# Altium PCB PCB1.PcbDoc
Units mm, origin at the board's own origin, x right, y up, seen from the top; angles counter-clockwise.
Board outline 22 x 22 mm, 4 copper layers (Top Layer, Internal Plane 1, Signal Layer 1, Bottom Layer), stack 0.778 mm thick; 56 components, 36 nets, 187 pads, 214 vias.
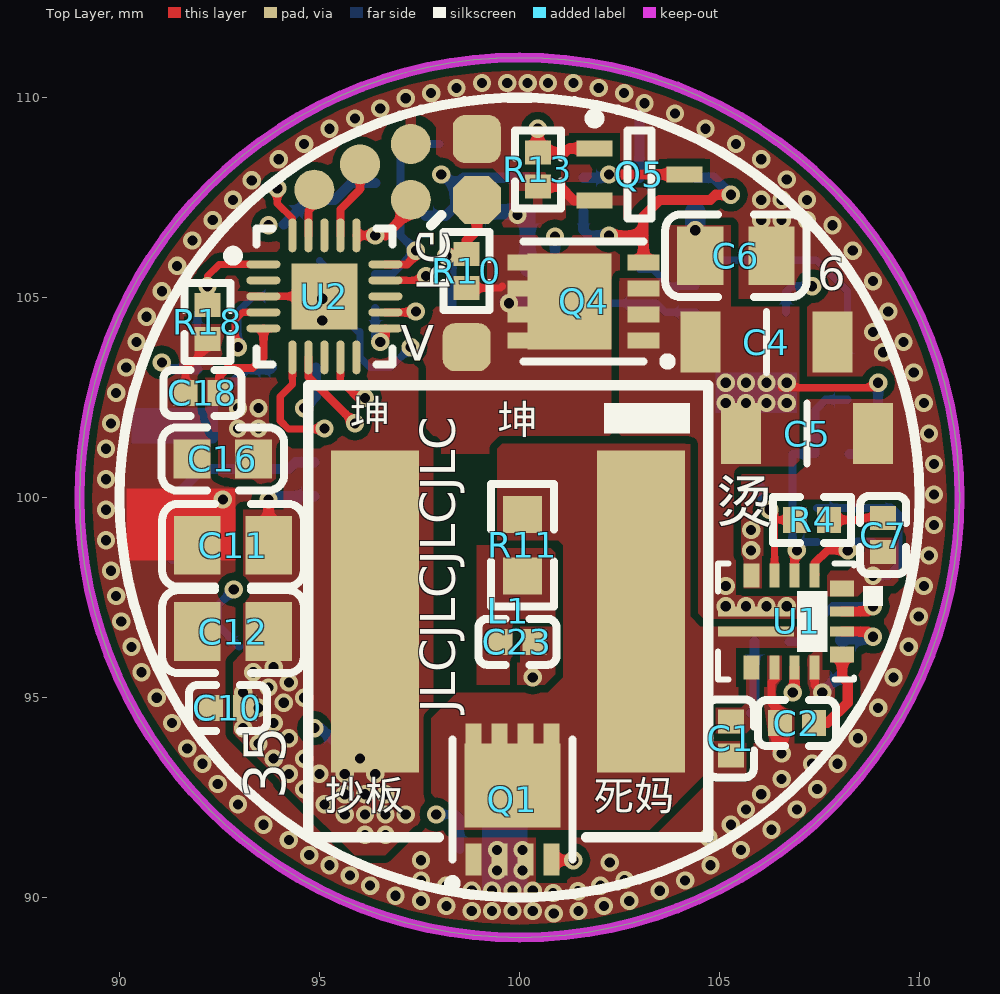
[diagram p0: Top Layer view]
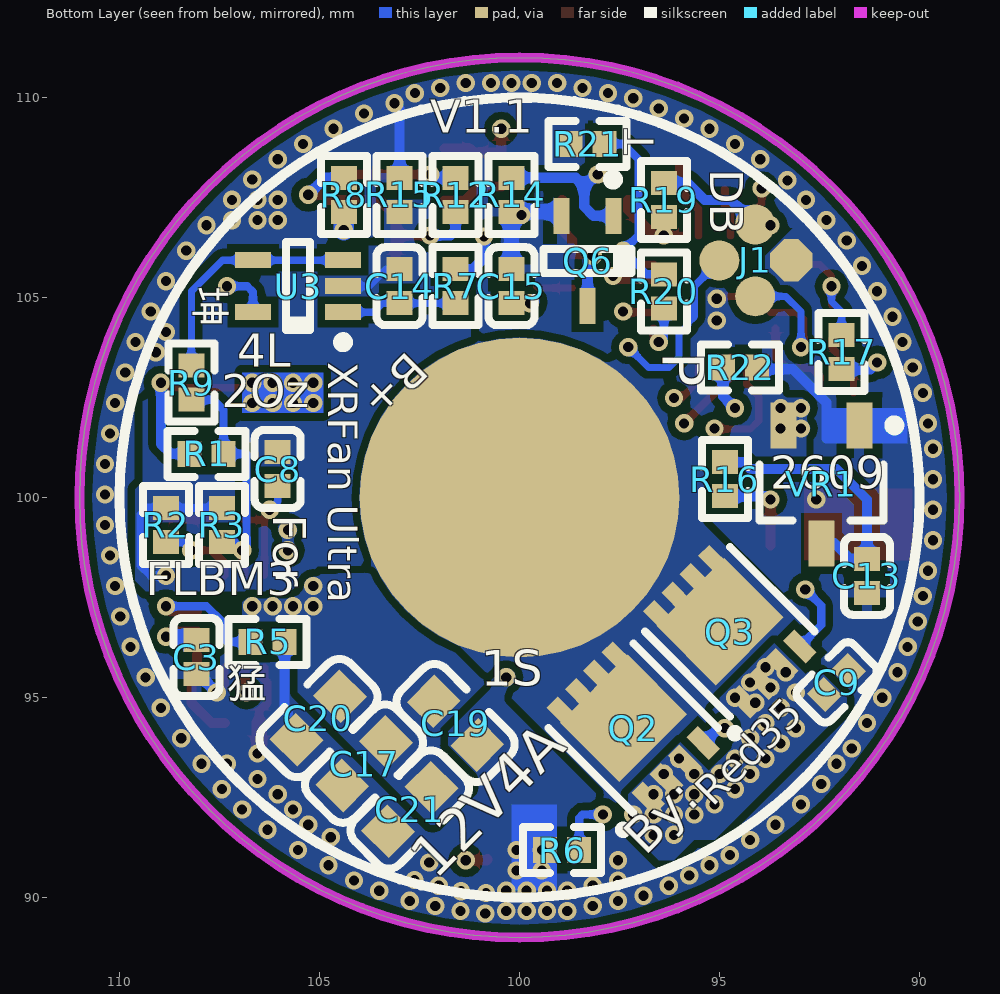
[diagram p1: Bottom Layer view, seen from below]
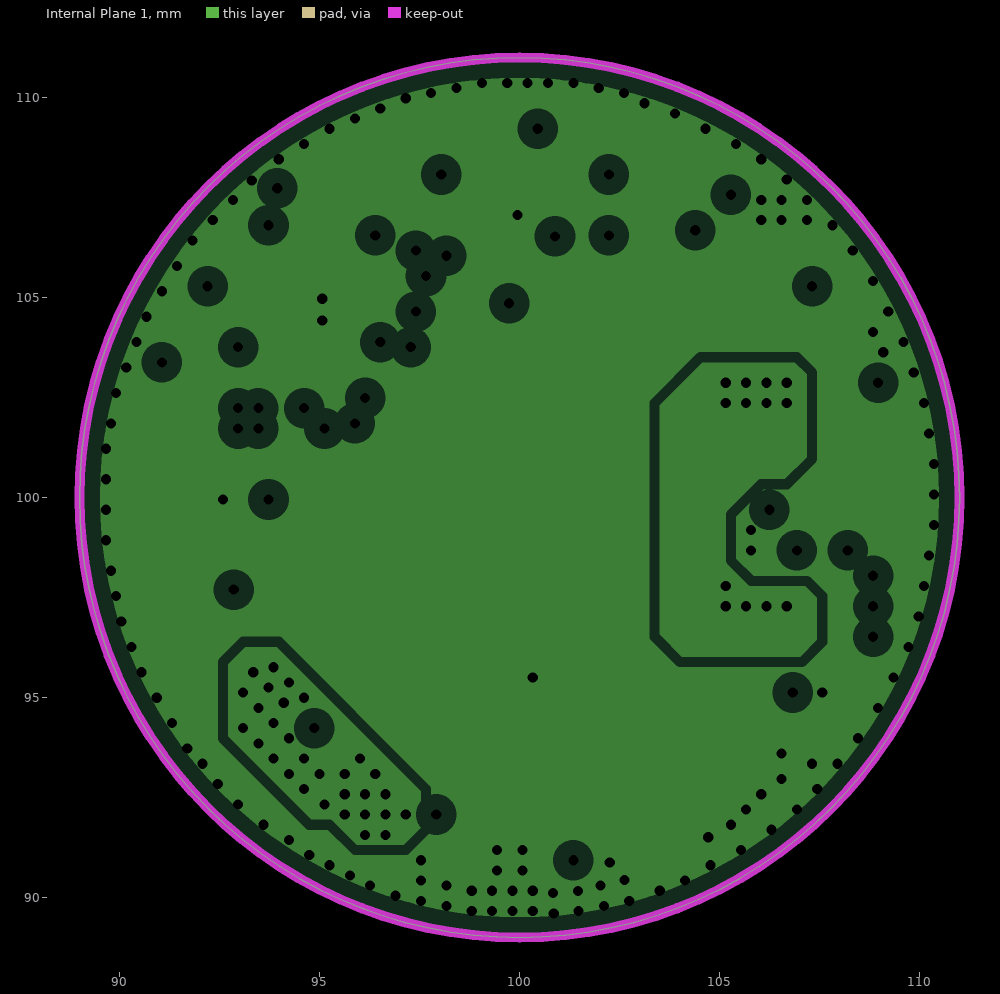
[diagram p2: Internal Plane 1, clearances drawn from the general rule]
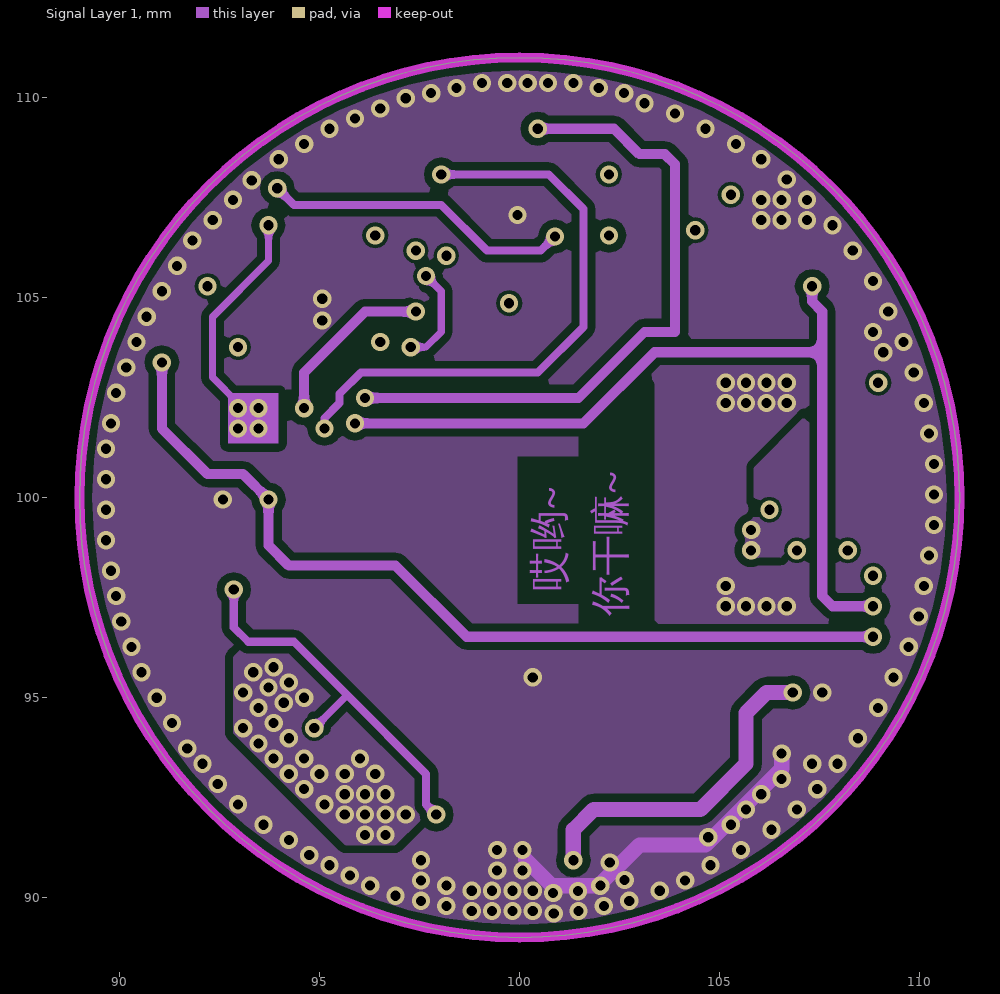
[diagram p3: Signal Layer 1]
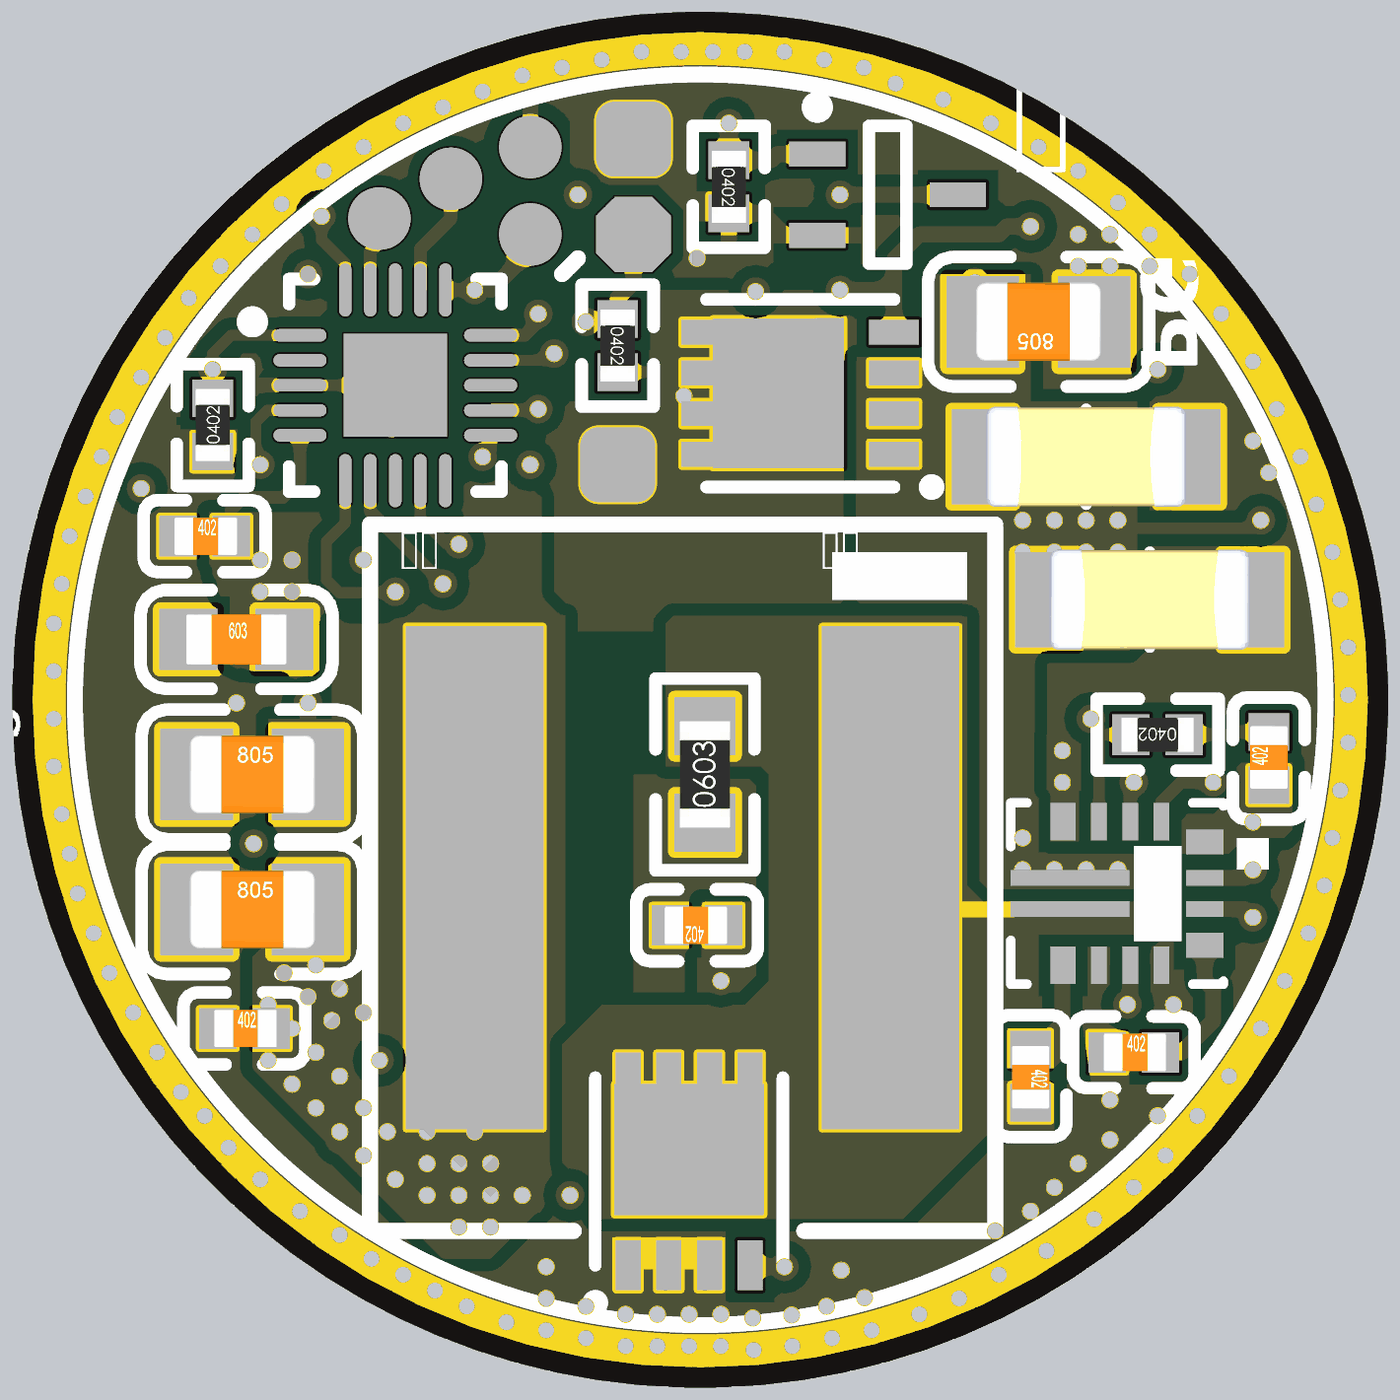
[diagram p4: 3D render of the assembled board from above, using the file's embedded part models]
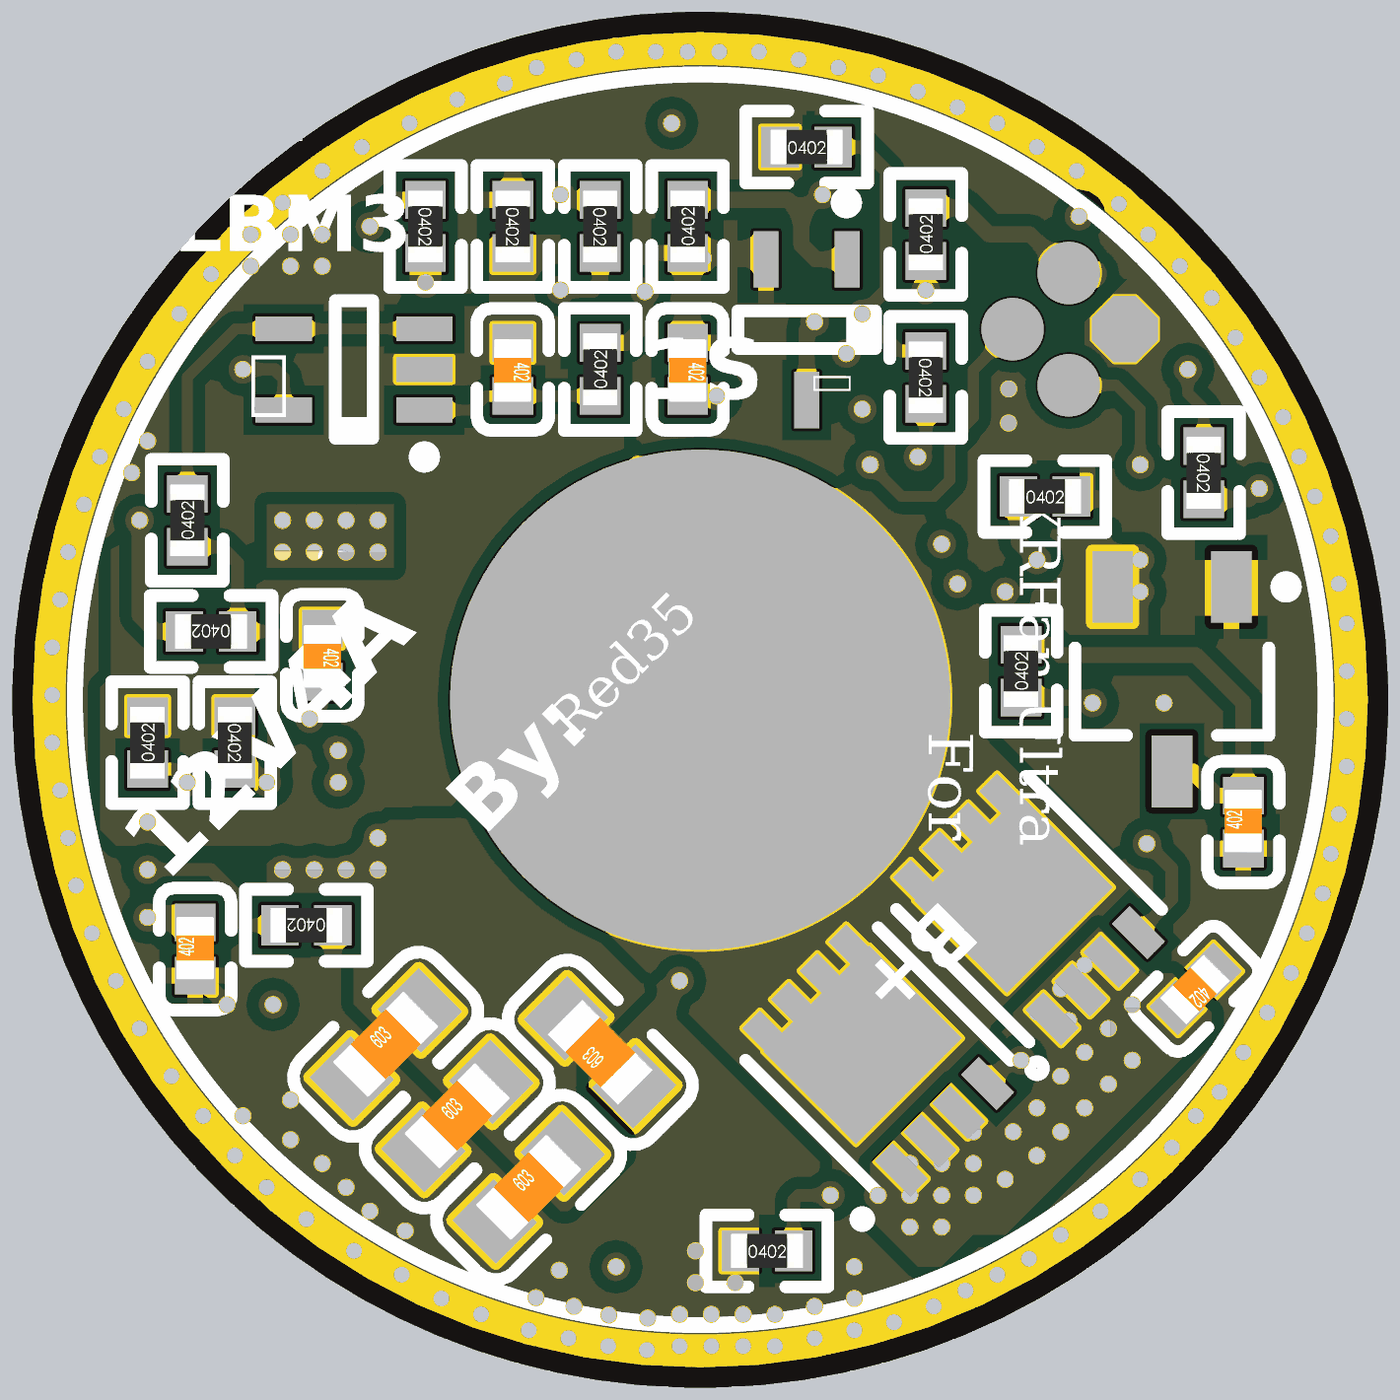
[diagram p5: 3D render of the assembled board from below, using the file's embedded part models]

## Layer stack, top to bottom
Top Solder: solder mask 0.0102, Solder Resist, Dk 3.5
Top Layer: signal copper 0.0356
Dielectric 1: core 0.254, FR-4, Dk 4.2
Internal Plane 1: plane copper 0.036
Dielectric 3: prepreg 0.127, Dk 4.2
Signal Layer 1: signal copper 0.036
Dielectric 2: core 0.254, Dk 4.2
Bottom Layer: signal copper 0.0356
Bottom Solder: solder mask 0.0102, Solder Resist, Dk 3.5

## Board outline
100,89 cw(c100,100) 89,100 cw(c100,100) 100,111 cw(c100,100) 111,100 cw(c100,100)

## Design rules (kind name [scope] priority, off if disabled: settings)
Clearance [All] p1: gap=0.193
PlaneClearance [All] p1: clearance=0.381
PlaneConnect [All] p1: planeconnectstyle=Direct reliefexpansion=0.508 reliefentries=4 reliefconductorwidth=0.254 reliefairgap=0.254
PolygonConnect PolygonConnect_1 [IsVia] p1: connectstyle=Direct reliefconductorwidth=0.254 reliefentries=4 polygonreliefangle="90 Angle" airgapwidth=0.254
PolygonConnect [All] p2: connectstyle=Direct reliefconductorwidth=0.254 reliefentries=4 polygonreliefangle="90 Angle" airgapwidth=0.254
RoomDefinition main [InComponentClass('main')] p1: confinementstyle=ConfineIn formatcopy=TRUE lockcomponents=FALSE outline 112.649,87.503 163.322,87.503 163.322,98.171 112.649,98.171
RoutingVias [All] p1: holewidth=0.711 width=1.27 viastyle="Through Hole" minholewidth=0.711 minwidth=1.27 maxholewidth=0.711 maxwidth=1.27
SolderMaskExpansion [All] p1: expansion=0.102
Width [All] p1: maxlimit=5.08 minlimit=0.178 preferedwidth=0.254
28 further rules are at their usual default settings.

## Components (designator, comment, footprint, x,y, rotation, side; value= is the part's Value field where it differs from the comment)
C1 "100nF (104) 10% 50V" 0402_C 105.283,93.98 r270 top
C2 "4.7uF (475) 20% 10V" 0402_C 106.934,94.361 r0 top
C3 "100nF (104) 10% 50V" 0402_C 108.077,96.012 r90 bottom
C4 "GRM31CR61E476ME44L" 1206C 106.172,103.886 r180 top
C5 "GRM31CR61E476ME44L" 1206C 107.188,101.6 r180 top
C6 "22uF (226) 20% 25V" 0805_C 105.41,106.045 r180 top
C7 "47nF (473) 10% 50V" 0402_C 109.093,99.06 r90 top
C8 "56pF (560) 5% 50V" 0402_C 106.045,100.711 r270 bottom
C9 "10uF (106) 20% 10V" 0402_C 92.075,95.377 r315 bottom
C10 "10uF (106) 20% 10V" 0402_C 92.71,94.742 r0 top
C11 "C2012X5R1A476MTJ00E" 0805_C 92.837,98.806 r0 top
C12 "C2012X5R1A476MTJ00E" 0805_C 92.837,96.647 r0 top
C13 "10uF (106) 20% 10V" 0402_C 91.313,98.044 r90 bottom
C14 "1.0uF (105) 10% 25V" 0402_C 102.997,105.283 r270 bottom
C15 "1.0uF (105) 10% 25V" 0402_C 100.203,105.283 r270 bottom
C16 "GRM188R61E106KA73D" 0603_C 92.583,100.965 r0 top
C17 "GRM188R61E106KA73D" 0603_C 103.886,93.345 r135 bottom
C18 "100nF (104) 10% 50V" 0402_C 92.075,102.616 r0 top
C19 "GRM188R61E106KA73D" 0603_C 101.6,94.361 r45 bottom
C20 "GRM188R61E106KA73D" 0603_C 105.029,94.488 r135 bottom
C21 "GRM188R61E106KA73D" 0603_C 102.743,92.202 r135 bottom
C23 "2.2nF (222) 10% 50V" 0402_C 99.949,96.393 r180 top
J1 "CMS8S-JTAG-TP-1.27mm" CMS8S-JTAG-TP-2x2-P1.27 94.107,105.029 r45 top
L1 "XAL1060-222MEC" XAL1060-472ME-Lifted 96.393,97.155 r0 top locked
Q1 "BSZ024N04LS6ATMA1" DFN-8_L3.0-W3.0-P0.65-BL 99.822,92.456 r0 top
Q2 "XPX80P02RX" DFN-8_L3.0-W3.0-P0.65-BL 97.155,94.234 r135 bottom locked
Q3 "XPX80P02RX" DFN-8_L3.0-W3.0-P0.65-BL 94.742,96.647 r135 bottom locked
Q4 "XPX70P03RX" DFN-8_L3.0-W3.0-P0.65-BL 101.6,104.902 r90 top
Q5 "2N7002KW" SC70-3 102.997,108.077 r0 top
Q6 "2N7002KW" SC70-3 98.298,105.918 r270 bottom locked
R1 "510KΩ (5103) ±1%" 0402_R 107.823,101.092 r0 bottom
R2 "RT0402BRD0720KL" 0402_R 108.839,99.314 r90 bottom
R3 "59KΩ (5902) ±1%" 0402_R 107.442,99.314 r270 bottom
R4 "PTFR0402B10K0N9" 0402_R 107.315,99.441 r180 top
R5 "10KΩ (1002) ±1%" 0402_R 106.299,96.393 r0 bottom
R6 "10KΩ (1002) ±1%" 0402_R 98.933,91.186 r180 bottom
R7 "10KΩ (1002) ±1%" 0402_R 101.6,105.283 r90 bottom
R8 "51KΩ (5102) ±1%" 0402_R 104.394,107.569 r270 bottom
R9 "220KΩ (2203) ±1%" 0402_R 108.204,102.87 r90 bottom
R10 "22KΩ (2202) ±1%" 0402_R 98.679,105.664 r270 top
R11 "2.2Ω (2R20) ±1%" 0603_R 100.076,98.806 r90 top
R12 "47KΩ (4702) ±1%" 0402_R 101.6,107.569 r270 bottom
R13 "10KΩ (1002) ±1%" 0402_R 100.457,108.204 r270 top
R14 "10KΩ (1002) ±1%" 0402_R 100.203,107.569 r90 bottom
R15 "0Ω (0R0) ±1%" 0402_R 102.997,107.569 r270 bottom
R16 "10Ω (10R0) ±1%" 0402_R 94.869,100.457 r90 bottom
R17 "AR02BTD4703" 0402_R 91.948,103.632 r270 bottom
R18 "ERA2AEB104X" 0402_R 92.202,104.394 r90 top
R19 "10KΩ (1002) ±1%" 0402_R 96.393,107.442 r90 bottom
R20 "RC0402DR-07330KL" 0402_R 96.393,105.156 r270 bottom
R21 "FNTC0402X104D4250DB" 0402_R 98.298,108.839 r180 bottom
R22 "TBD" 0402_R 94.488,103.251 r180 bottom
U1 "TPS61287RZPR" RZP0014A-TPS61287 106.934,96.901 r270 top locked
U2 "CMS8S6990NAQN20" QFN40P300X300X800_HS-21N 95.123,105.029 r0 top
U3 "LMV321IDCKR" SC70-5 105.537,105.283 r0 bottom
VR1 "ME6209A30M3G" SOT-23-3L 92.456,100.33 r90 bottom

## Footprints (in the part's own frame and the unit in brackets; to place one, negate y for a bottom-side part, rotate by r counter-clockwise, add the part's x,y. Pads: shape width x height; smd on the part's side, far side on the other; paste and mask are expansions set on the pad)
0402_C [mm]
  rect 0.6x0.65 smd mask+0.051: 1(-0.425,0) 2(0.425,0)
  silkscreen extent -0.97,-0.58 0.97,0.58, body extent -0.48,-0.3 0.52,0.3, height 0.2
0402_R [mm]
  rect 0.6x0.65 smd mask+0.051: 1(-0.425,0) 2(0.425,0)
  silkscreen extent -0.97,-0.58 0.97,0.58, body extent -0.57,-0.27 0.57,0.28, height 0.41
0603_C [mm]
  rect 0.93x0.98 smd: 1(-0.77,0) 2(0.77,0)
  silkscreen extent -1.53,-0.79 1.54,0.79, body extent -0.8,-0.4 0.8,0.4, height 0.3
0603_R [mm]
  rect 0.93x0.98 smd: 1(-0.77,0) 2(0.77,0)
  silkscreen extent -1.53,-0.79 1.54,0.79, body extent -0.85,-0.4 0.85,0.4, height 0.56
0805_C [mm]
  rect 1.16x1.47 smd: 1(-0.89,0) 2(0.89,0)
  silkscreen extent -1.77,-1.04 1.77,1.04, body extent -1,-0.62 1,0.63, height 0.77
1206C [mil]
  rect 39.37x60 smd: 1(-65,0) 2(65,0)
  silkscreen extent 0,-30 0,30, body extent -63,-31 63,31, height 37
CMS8S-JTAG-TP-2x2-P1.27 [mm] "面向CMS8S单片机使用的2*2排列，间距1.27mm的调试接口"
  oct 1x1 smd far side mask+0.03: 1(0,1.27)
  round 1 smd far side mask+0.03: 2(1.27,1.27) 3(0,0) 4(1.27,0)
DFN-8_L3.0-W3.0-P0.65-BL [mm]
  rect 0.4x0.8 smd paste-100 mask+0.051: 1(-0.975,-1.5) 2(-0.325,-1.5) 3(0.325,-1.5) 4(0.975,-1.5) 5(0.975,1.5) 6(0.325,1.5) 7(-0.325,1.5) 8(-0.975,1.5)
  rect 2.4x2.1 smd paste-100 mask+0.051: 8(0,0.35)
  silkscreen extent -1.6,-2.2 1.5,1.5, body extent -1.52,-1.52 1.52,1.52, height 1.2
QFN40P300X300X800_HS-21N [mm] "QFN, 20-Leads, Body 3.00x3.00mm, Pitch 0.40mm, Thermal Pad 1.65x1.65mm, IPC Medium Density"
  oval 0.85x0.2 smd mask+0.03: 1(-1.525,0.8) 2(-1.525,0.4) 3(-1.525,0) 4(-1.525,-0.4) 5(-1.525,-0.8) 11(1.525,-0.8) 12(1.525,-0.4) 13(1.525,0) 14(1.525,0.4) 15(1.525,0.8)
  oval 0.2x0.85 smd mask+0.03: 6(-0.8,-1.525) 7(-0.4,-1.525) 8(0,-1.525) 9(0.4,-1.525) 10(0.8,-1.525) 16(0.8,1.525) 17(0.4,1.525) 18(0,1.525) 19(-0.4,1.525) 20(-0.8,1.525)
  rect 1.65x1.65 smd mask+0.03: 21(0,0)
  silkscreen extent -2.41,-1.7 1.7,1.7, body extent -1.55,-1.55 1.55,1.55, height 0.8
RZP0014A-TPS61287 [mm]
  rect 0.6x0.25 smd paste+0 mask+0: 1(-1.15,0.443) 2(-1.15,-0.057) 3(-1.15,-0.557) 8(1.15,-0.557) 9(1.15,-0.057) 10(1.15,0.443)
  rect 0.6x0.4 smd paste+0 mask+0: 4(-1.15,-1.132) 7(1.15,-1.132)
  rect 0.25x1.9 smd paste+0 mask+0: 5(-0.25,-1.017) 6(0.25,-1.017)
  rect 0.4x0.6 smd paste+0 mask+0: 11(0.825,1.133) 14(-0.825,1.133)
  rect 0.25x0.6 smd paste+0 mask+0: 12(0.25,1.133) 13(-0.25,1.133)
  silkscreen extent -1.45,-1.97 1.45,1.43, body extent -1.4,-1.92 1.4,1.38, height 1
SC70-3 [mm] "3 Lead SC70(SOT-323) package for small Transistor"
  rect 0.9x0.4 smd mask+0.05: 1(-1.125,0.65) 2(-1.125,-0.65) 3(1.125,0)
  silkscreen extent -1.25,-1.1 0.3,1.52, body extent -0.67,-1.1 0.67,1.1, height 1.1
SC70-5 [mm] "SOT23, 6-Leads, Body 2.00x2.10mm, Pitch 0.65mm, IPC Medium Density"
  rect 0.9x0.4 smd mask+0.05: 1(-1.125,0.65) 2(-1.125,0) 3(-1.125,-0.65) 4(1.125,-0.65) 5(1.125,0.65)
  silkscreen extent -1.25,-1.1 0.3,1.52, body extent -0.67,-1.1 0.67,1.1, height 1.1
SOT-23-3L [mm] "http://www.aosmd.com/res/packaging_information/SOT-23-3L.pdf"
  rect 1.15x0.65 smd: 1(1.475,-0.95) 2(1.475,0.95) 3(-1.475,0)
  silkscreen extent -0.9,-1.95 1.6,1.55, body extent -0.9,-1.55 0.9,1.55, height 1.25
XAL1060-472ME-Lifted [mm] "线艺XAL1060电感的特殊封装，使用铜条向上抬升电感高度在电感下部塞元器件"
  rect 2.2x8.05 smd mask+0.05: 1(0,0) 2(6.65,0)
  silkscreen extent -1.68,-5.65 8.32,5.65, body extent -1.65,-5.71 8.38,5.71, height 7

## Part data
C1 C3 C7 C18: library part "0402 100nF (104) 10% 16V", "贴片电容"
C2: library part "0402 4.7uF (475) 20% 10V", "贴片电容"
C4 C5: library part Cap, "1206尺寸村田MLCC 25V 47uF X5R ±20%"
C6: library part "0805 22uF (226) 20% 25V", "贴片电容"
C8: library part "0402 56pF (560) 5% 50V", "贴片电容"
C9 C10 C13: library part "0402 10uF (106) 20% 6.3V", "贴片电容"
C11 C12: library part "0805 22uF (226) 20% 25V", "贴片MLCC电容，X5R 47uF ±20% 10V"
C14 C15: library part "0402 1.0uF (105) 10% 25V", "贴片电容"
C16 C17 C19 C20 C21: library part "0603 10uF (106) 10% 10V", "村田贴片MLCC电容 25V 10uF±20% X5R 0603封装"
C23: library part "0402 2.2nF (222) 10% 50V", "贴片电容"
J1: "面向CMS8S6990NA单片机的调试贴片触点，并不是元器件实物"
L1: library part "Inductor Iron", "线艺一体成型模压电感，9.8mΩ DCR 25A饱和电流 4.7uH±20%电感量 10*11*6mm尺寸"
Q1: library part "SON/DFN5x6 MOS", "英飞凌OptiMOS 6 40V N沟道功率MOS 2.8mΩ@4.5V S3O8封装"
Q2 Q3: library part "SON/DFN5x6 MOS", "PDFN3x3 30V 50A N沟道MOSFET"
Q4: library part "SON/DFN5x6 MOS", "-30V -70A 6.5mR P沟道增强型MOSFET"
Q5 Q6: library part "2N7002 7002", "单N沟道MOSFET(场效应管)"
R1 R3: library part "0402 510KΩ (5103) 1%", "贴片电阻"
R2: library part "0402 20KΩ (2002) 1%", "0402贴片薄膜高精密电阻 20KΩ ±0.1% 62.5mW 25PPM"
R4: library part "0402 12KΩ (1202) 1%", "0402贴片薄膜高精密电阻 10KΩ ±0.1% 62.5mW 25PPM"
R5 R6 R7 R13 R14 R19: library part "0402 10KΩ (1002) 1%", "贴片电阻"
R8: library part "0402 47KΩ (4702) 1%", "贴片电阻"
R9: library part "0402 100KΩ (1003) 1%", "贴片电阻"
R10: library part "0402 22KΩ (2202) 1%", "贴片电阻"
R11: library part "0603 2.2Ω (2R20) 1%", "贴片电阻"
R12: library part "0402 51KΩ (5102) 1%", "贴片电阻"
R15 R22: library part "0402 0Ω (0R0) 1%", "贴片电阻"
R16: library part "0402 10Ω (10R0) 1%", "贴片电阻"
R17: library part "0402 470KΩ (4703) 1%", "0402 贴片薄膜高精密低温飘电阻 470KΩ±0.1% 25PPM"
R18: library part "0402 100KΩ (1003) 1%", "松下 0402精密低温飘贴片电阻 100KΩ±0.1% 62.5mW"
R20: library part "0402 470KΩ (4703) 1%", "0402厚膜较高精度贴片电阻 330KΩ±0.5% 62.5mW"
R21: library part "0402 200KΩ (2003) 1%", "0402尺寸贴片式NTC热敏电阻 B25-85℃=4310±0.5% R25=100KΩ±0.5%"
U1: library part TPS61287, "Synchronous Boost Converter with Stackable Multi-Phase Function"
U2: library part CM8S6990NA-QFN20, "增强型闪存1T 8051单片机，16KB Flash 256+1K XRAM"
U3: "CMOS超小型运算放大器，SC70-5"
VR1: library part "SOT-23 XC6206P332MR", "低压差线性稳压(LDO)"

## Free pads (board coordinates)
  rrect50% 1.2x1.2 smd mask+0.03: 1(98.679,103.759) 1(98.933,108.966)
  oct 1.2x1.2 smd mask+0.03: 1(98.933,107.442)
  round 8 smd far side mask+0.03: 1(100,100)
  round 1 smd mask+0.03: 4(94.869,107.696) 4(96.012,108.331) 4(97.282,107.442) 4(97.282,108.839)

## Via types
v1: diameter 0.457, hole 0.254, Top Layer to Bottom Layer, tented both sides, 214 vias

## Nets (pads, with @x,y where several pads share a name; then routed paths per layer and width w, separated by ;. In a path a pad name is that pad's centre, name@x,y a point inside that pad or via, vN(x,y) a via of type N, cw(c..) or ccw(c..) an arc to the next point about the centre after c; other vN are vias at no path point)
3V7: C3.2 C9.2 C10.2 C11.2 C12.2 L1.1 Q2.1 Q2.2 Q2.3 Q3.1 Q3.2 Q3.3 R16.1 R17.2 U1.12 | length 27.2
  Top Layer w0.254: v1(93.726,99.949) v1(93.726,99.949) C11.2 ; U1.12 108.708,96.651 v1(108.839,96.52)
  Signal Layer 1 w0.254: v1(91.059,103.378) 91.059,101.727 92.202,100.584 93.091,100.584 v1(93.726,99.949) 93.726,98.806 94.234,98.298 96.901,98.298 98.679,96.52 v1(108.839,96.52)
  Bottom Layer w0.254: v1(91.059,103.378) 91.23,103.207 R17.2 ; v1(93.726,99.949) 93.809,100.032 R16.1
  Bottom Layer w0.381: C3.2 108.16,96.52 v1(108.839,96.52)
  other v1: 96.139,91.567 96.647,91.567 95.631,92.075 96.139,92.075 96.647,92.075 97.155,92.075 95.123,92.329 95.631,92.583 96.139,92.583 96.647,92.583 94.615,92.71 94.234,93.091 94.996,93.091 95.631,93.091 96.393,93.091 93.853,93.472 94.615,93.472 96.012,93.472 93.472,93.853 94.234,93.98 93.091,94.234 93.853,94.361 93.472,94.742 94.107,94.869 94.615,94.996 93.091,95.123 93.726,95.25 94.234,95.377 93.345,95.631 93.853,95.758
12V: C4.2 C5.2 C6.2 C17.2 C19.2 C20.2 C21.2 Q4.1 Q4.2 Q4.3 R1.2 R8.2 U1.5 | length 5.3
  Top Layer w0.178: v1@106.553,102.743 108.839,102.743 v1(108.966,102.87)
  Bottom Layer w0.254: R1.2 108.712,101.092 108.966,101.346 v1(108.966,102.87)
  Bottom Layer w0.508: v1(104.394,106.68) R8.2
  other v1: 105.156,97.282 105.664,97.282 106.172,97.282 106.68,97.282 105.156,97.79 105.156,102.362 105.664,102.362 106.172,102.362 106.68,102.362 105.156,102.87 105.664,102.87 106.172,102.87 106.68,102.87
BST: C1.1 U1.7
COMP: C8.2 R4.2 U1.3 | length 2.9
  Top Layer w0.178: v1(106.247,99.695) 106.377,99.566 106.377,99.392 ; U1.3 106.377,99.392 ; R4.2 106.426,99.441 106.377,99.392
  Bottom Layer w0.178: C8.2 106.045,99.897 v1(106.247,99.695)
DCEN: R5.2 U1.13 U2.7 U3.5 | length 28.5
  Top Layer w0.203: U2.7 94.723,103.016 95.863,101.876 95.863,101.854 v1(95.885,101.854)
  Top Layer w0.254: U1.13 108.708,97.151 v1(108.839,97.282)
  Signal Layer 1 w0.254: v1(95.885,101.854) 101.6,101.854 103.378,103.632 107.569,103.632 ; v1(107.315,105.283) 107.315,104.902 107.569,104.648 107.569,103.632 ; v1(108.839,97.282) 107.823,97.282 107.569,97.536 107.569,103.632
  Bottom Layer w0.203: U3.5 106.662,105.138 106.807,105.283 v1(107.315,105.283) ; R5.2 107.315,96.393 107.442,96.52 107.442,96.901 107.823,97.282 v1(108.839,97.282)
DSCK: J1.4 U2.14 | length 8
  Top Layer w0.178: U2.14 97.555,105.429 v1(97.663,105.537)
  Signal Layer 1 w0.178: v1(97.282,103.759) 97.663,103.759 98.044,104.14 98.044,105.156 v1(97.663,105.537)
  Bottom Layer w0.178: J1.4 95.005,105.909 95.631,105.283 95.631,104.521 95.786,104.366 95.786,104.314 95.951,104.149 96.008,104.149 96.008,104.115 96.009,104.114 96.009,103.854 96.009,103.675 96.012,103.672 96.012,103.505 96.266,103.251 96.774,103.251 v1(97.282,103.759)
DSDA: J1.3 U2.4 | length 3.8
  Top Layer w0.178: v1(92.964,103.759) 92.891,103.832 92.891,104.448 93.072,104.629 U2.4 U2.4@93.725,104.629
  Bottom Layer w0.178: v1(92.964,103.759) 92.964,104.648 93.345,105.029 J1.3
FANG: Q4.4 R8.1 R12.2 | length 6.6
  Top Layer w0.254: v1(102.235,106.553) 103.1,106.553 ; Q4.4 103.1,106.553 ; v1(105.283,107.569) 104.902,107.569 104.775,107.442 103.505,107.442 103.1,107.037 103.1,106.553
  Bottom Layer w0.254: R12.2 101.6,106.68 101.727,106.553 v1(102.235,106.553) ; R8.1 104.858,107.994 v1(105.283,107.569)
FANPWM: pad.1@98.933,107.442 Q6.3 R10.1 | length 3.3
  Top Layer w0.254: v1(98.171,106.045) 98.215,106.089 R10.1 98.679,106.426 98.933,106.68 pad.1@98.933,107.442
  Bottom Layer w0.254: v1(98.171,106.045) 98.298,105.918 Q6.3
FANPWREN: Q5.1 R13.1 U2.9 | length 19.8
  Top Layer w0.178: U2.9 95.523,102.912 95.946,102.489 v1(96.139,102.489)
  Top Layer w0.254: v1(100.457,109.22) R13.1 101.136,108.629 101.234,108.727 Q5.1
  Signal Layer 1 w0.254: v1(96.139,102.489) 101.473,102.489 103.124,104.14 103.886,104.14 103.886,108.331 103.632,108.585 102.997,108.585 102.362,109.22 v1(100.457,109.22)
FB: R1.1 R3.2 R9.1 U1.2 | length 6.3
  Top Layer w0.203: U1.2 106.877,98.495 v1@107.061,98.679
  Bottom Layer w0.203: R3.2 107.144,98.889 v1(106.934,98.679) 106.822,98.791 106.822,101.092 R1.1 107.398,102.191 107.652,102.445 R9.1
FWMODE: R22.1 U2.12 | length 6.2
  Top Layer w0.203: U2.12 v1@97.39,104.629
  Top Layer w0.254: v1@97.39,104.629 v1(97.409,104.648)
  Signal Layer 1 w0.254: v1(94.615,102.235) 94.615,103.124 96.139,104.648 v1(97.409,104.648)
  Bottom Layer w0.254: v1(94.615,102.235) 94.913,102.533 R22.1
GLED: pad.4@96.012,108.331 U2.17 | length 2
  Top Layer w0.203: U2.17 95.523,107.207 96.012,107.696 pad.4@96.012,108.331
GND: C2.1 C3.1 C4.1 C5.1 C6.1 C9.1 C10.1 C11.1 C12.1 C13.1 C15.1 C16.1 C17.1 C18.1 C19.1 C20.1 C21.1 C23.1 J1.1 pad.1@98.933,108.966 pad.4@97.282,108.839 Q1.1 Q1.2 Q1.3 Q5.2 Q6.2 R5.1 R6.1 R13.2 R14.1 R15.1 R18.1 R21.1 R22.2 U1.4 U1.8 U1.10 U2.3 U2.21 VR1.1 | length 25.7
  Top Layer w0.178: C18.1 91.65,103.207 92.202,103.759 R18.1 ; U2.3@93.725,105.029 U2.21@95.25,105.029
  Top Layer w0.203: U1.8 106.377,95.455 106.299,95.377 106.299,94.869 106.509,94.659 C2.1 ; U1.10 107.377,95.315 v1@107.442,95.25
  Top Layer w0.254: R13.2 101.009,107.779 101.361,107.427 Q5.2
  Top Layer w0.381: C2.1 106.509,93.643 v1(106.553,93.599)
  Signal Layer 1 w0.381: 100.147,90.956 100.806,90.297 101.981,90.297 102.997,91.313 104.648,91.313 106.553,93.218 v1(106.553,93.599)
  Bottom Layer w0.254: 92.329,101.473 92.329,102.376 93.163,103.21 93.768,103.21 R22.2@93.809,103.251 ; R15.1 102.997,109.728 v1(103.124,109.855) ; 105.791,94.615 105.874,94.698 R5.1 ; v1(107.569,95.123) 108.033,95.587 C3.1
  Bottom Layer w0.381: Q6.2 99.049,107.144 R14.1 C15.1
  other v1: 100.855,89.6 98.806,89.662 99.314,89.662 99.822,89.662 100.33,89.662 101.473,89.662 98.171,89.789 102.108,89.789 97.536,89.916 102.743,89.916 96.901,90.043 100.84,90.111 98.806,90.17 99.314,90.17 99.822,90.17 100.33,90.17 101.462,90.159 103.505,90.17 96.266,90.297 98.171,90.297 102.021,90.298 97.536,90.424 102.628,90.436 104.14,90.424 95.758,90.551 99.441,90.678 100.076,90.678 95.25,90.805 104.775,90.805 102.255,90.876 97.536,90.932 94.742,91.059 99.441,91.186 100.076,91.186 105.537,91.186 94.234,91.44 104.718,91.505 106.299,91.694 93.599,91.821 105.283,91.821 105.664,92.202 106.934,92.202 92.964,92.329 106.045,92.583 107.442,92.71 92.456,92.837 106.553,92.964 92.075,93.345 107.315,93.345 107.95,93.345 91.694,93.726 108.458,93.98 91.313,94.361 108.966,94.742 90.932,94.996 100.33,95.504 109.347,95.504 90.551,95.631 90.297,96.266 109.728,96.266 90.043,96.901 109.982,97.028 89.916,97.536 110.109,97.79 89.789,98.171 110.236,98.552 105.791,98.679 89.662,98.933 105.791,99.187 110.363,99.314 89.662,99.695 92.583,99.949 110.363,100.076 89.662,100.457 110.363,100.838 89.662,101.219 110.236,101.6 89.789,101.854 110.109,102.362 89.916,102.616 109.855,103.124 90.17,103.251 109.093,103.632 90.424,103.886 109.601,103.886 108.839,104.14 95.07,104.426 90.678,104.521 109.22,104.648 95.068,104.971 91.059,105.156 108.839,105.41 91.44,105.791 108.331,106.172 91.821,106.426 107.823,106.807 92.329,106.934 106.045,106.934 106.553,106.934 107.188,106.934 99.949,107.061 92.837,107.442 106.045,107.442 106.553,107.442 107.188,107.442 93.304,107.929 106.68,107.95 93.98,108.458 106.045,108.458 94.615,108.839 105.41,108.839 95.25,109.22 104.648,109.22 95.885,109.474 103.886,109.601 96.52,109.728 97.155,109.982 97.79,110.109 102.616,110.109 98.425,110.236 101.981,110.236 99.06,110.363 99.695,110.363 100.203,110.363 100.711,110.363 101.346,110.363
ILIM: R2.1 U1.1 | length 2
  Top Layer w0.203: U1.1@107.4,98.074 U1.1 107.377,98.36 107.696,98.679 v1(108.204,98.679)
  Bottom Layer w0.203: v1(108.204,98.679) 108.414,98.889 R2.1
INJO: R9.2 U3.3 U3.4 | length 6
  Bottom Layer w0.178: U3.3 U3.4 107.427,105.933 108.204,105.156 R9.2
INTVCC: C2.2 U1.11 | length 2.3
  Top Layer w0.254: C2.2 107.696,94.361 108.204,94.869 108.204,95.377 108.067,95.514 U1.11
KEY: pad.4@97.282,107.442 R19.1 U2.16 | length 1.9
  Top Layer w0.203: U2.16 U2.16 96.647,106.553
  Top Layer w0.254: 96.647,106.553 97.282,107.188 pad.4@97.282,107.442
  other v1: 96.393,106.553
LDRV: Q1.4 U1.9 | length 9.6
  Top Layer w0.254: Q1.4 100.821,90.932 v1(101.346,90.932) ; v1(106.833,95.126) 106.877,95.17 U1.9
  Signal Layer 1 w0.381: v1(101.346,90.932) 101.346,91.694 101.854,92.202 104.521,92.202 105.664,93.345 105.664,94.615 106.175,95.126 v1(106.833,95.126)
NetC7_2: C7.2 R4.1 | length 1.4
  Top Layer w0.203: R4.1 108.458,99.441 108.502,99.485 C7.2
NetC13_2: C13.2 R16.2 VR1.3 | length 6.7
  Bottom Layer w0.254: VR1.3 92.124,98.855 91.738,98.469 C13.2 91.313,99.949 92.075,100.711 94.234,100.711 94.405,100.882 R16.2
NetC14_2: C14.2 R7.1 U3.1 | length 2.9
  Bottom Layer w0.178: R7.1 C14.2 103.422,104.858 103.647,104.633 U3.1
NetC23_2: C23.2 R11.1
NetQ5_3: Q5.3 R12.1 | length 2.6
  Top Layer w0.254: v1(102.235,108.077) Q5.3
  Bottom Layer w0.254: R12.1 102.152,107.994 v1(102.235,108.077)
PWMCTRL: Q6.1 R14.2 U2.6 | length 21.3
  Top Layer w0.178: U2.6 94.323,102.832 94.019,102.528 94.019,101.92 94.227,101.712 95.108,101.712 v1(95.123,101.727)
  Signal Layer 1 w0.203: v1(95.123,101.727) 95.123,101.981 95.504,102.362 95.504,102.594 96.034,103.124 100.457,103.124 101.595,104.262 101.595,107.212 100.73,108.077 v1(98.044,108.077)
  Bottom Layer w0.254: Q6.1 98.153,107.043 98.384,107.274 98.384,107.782 ; v1(98.044,108.077) 98.088,108.077 98.384,107.782 ; R14.2 98.596,107.994 98.384,107.782
REVG: Q2.4 Q3.4 R6.2 | length 13.5
  Signal Layer 1 w0.178: v1(94.869,94.234) 95.694,95.059
  Signal Layer 1 w0.203: v1(92.857,97.699) 92.857,96.754 93.218,96.393 94.361,96.393 95.694,95.059 97.663,93.091 97.663,92.329 v1(97.917,92.075)
  Bottom Layer w0.203: v1(92.857,97.699) 92.456,97.298 92.456,96.812 Q3.4 ; v1(97.917,92.075) 98.425,92.075 98.508,91.992 R6.2
  Bottom Layer w0.254: v1(94.869,94.234) 95.034,94.234 Q2.4
RLED: pad.4@94.869,107.696 U2.19 | length 1.2
  Top Layer w0.203: U2.19 94.723,107.169 94.869,107.315 pad.4@94.869,107.696
SGND: C7.1 C8.1 C14.1 R2.2 R3.1 R15.2 U1.14 U3.2 | length 5.7
  Bottom Layer w0.178: C14.1 103.334,105.708 103.759,105.283 U3.2
  Bottom Layer w0.203: R3.1 109.303,99.739 109.474,99.568 109.474,98.298 109.22,98.044 v1(108.839,98.044)
SW: C1.2 L1.2 Q1.5 Q1.6 Q1.7 Q1.8 R11.2 U1.6
TEMPSEN: R20.1 R21.2 U2.15 | length 5.8
  Top Layer w0.203: U2.15 97.193,105.829 97.409,106.045 v1(97.409,106.172)
  Bottom Layer w0.203: R20.1 96.818,105.581 v1(97.409,106.172) 97.028,106.553 97.028,108.458 97.409,108.839 R21.2@98,108.839
TSEN: R20.2 U2.11 | length 1.3
  Top Layer w0.203: v1(96.52,103.886) 96.648,104.014 U2.11
  Bottom Layer w0.203: R20.2 96.393,104.013 v1(96.52,103.886)
VBAT: pad.1@100,100 Q2.5 Q2.6 Q2.7 Q2.8 Q3.5 Q3.6 Q3.7 Q3.8
VFAN: C15.2 pad.1@98.679,103.759 Q4.5 Q4.6 Q4.7 Q4.8 R10.2 | length 1.4
  Top Layer w0.178: R10.2 99.524,105.239 99.568,105.283
  Bottom Layer w0.381: v1@99.695,104.902 v1(99.739,104.858) C15.2
VMCU: C16.2 C18.2 J1.2 R19.2 U2.5 VR1.2 | length 10.6
  Top Layer w0.203: C18.2 92.5,103.041 92.695,103.236 93.33,103.236 93.598,103.504 U2.5
  Signal Layer 1 w0.178: v1(92.964,102.235) 92.964,102.362 92.329,102.997 92.329,104.521 93.726,105.918 v1(93.726,106.807)
  Bottom Layer w0.254: J1.2 94.724,107.442 95.377,107.442 95.802,107.867 R19.2
  other v1: 92.964,101.727 93.472,101.727 93.472,102.235
VPWM: R7.2 U2.20 | length 10.4
  Top Layer w0.178: v1(93.943,107.733) 93.943,107.352 94.323,106.972 U2.20
  Signal Layer 1 w0.203: v1(93.943,107.733) 94.361,107.315 98.044,107.315 99.187,106.172 100.53,106.172 v1(100.885,106.527)
  Bottom Layer w0.254: v1(100.885,106.527) 100.885,105.998 101.175,105.708 R7.2
VSEN: R17.1 R18.2 U2.1 | length 3.6
  Top Layer w0.178: R18.2 v1(92.202,105.283) 92.202,105.537 92.494,105.829 U2.1
  Bottom Layer w0.178: R17.1 91.948,104.648 92.202,104.902 v1(92.202,105.283)
pads on no net: U2.2 U2.8 U2.10 U2.13 U2.18

## Polygon pours and split planes (outlines as drawn)
GND on Bottom Layer "Component Side-No Net 1" (solid, remove dead copper, pour order 75): 87.503,102.743 87.757,102.489 94.107,102.489 94.234,102.362 94.234,100.457 95.123,99.568 95.758,98.933 95.758,97.79 95.758,91.694 93.472,89.408 92.583,90.297 87.503,90.297
VMCU on Bottom Layer "Component Side-No Net 1" (solid, remove dead copper, pour order 72): 92.837,102.489 94.107,102.489 94.234,102.362 94.234,100.711 92.837,100.711
SGND on Bottom Layer "Component Side-No Net 1" (solid, remove dead copper, pour order 65): 104.952,98.375 104.875,98.298 102.743,98.298 102.743,102.362 101.219,103.886 101.219,105.283 102.235,105.283 102.235,106.807 102.235,107.442 102.489,107.442 103.378,107.442 103.378,106.299 104.775,106.299 105.156,106.299 105.41,106.045 105.522,105.933 107.427,105.933 108.204,105.156 109.422,103.938 109.422,97.663 105.713,97.663 105.586,97.79
SGND on Bottom Layer "Component Side-No Net 1" (solid, remove dead copper, pour order 56): 104.902,101.473 104.521,98.278 105.049,98.278 105.283,98.044 105.664,97.663 106.68,97.663 109.347,97.663 109.601,97.917 109.601,99.949 109.601,100.203 109.347,100.457 109.22,100.33 109.22,99.06 109.093,98.933 107.315,98.933 106.934,99.314 106.68,99.568 106.68,101.473
VBAT on Bottom Layer "Component Side-No Net 1" (solid, remove dead copper, pour order 47): 93.345,97.028 97.663,92.71 97.917,92.71 103.378,98.171 103.251,98.298 103.251,101.219 101.219,101.219 99.314,103.124 98.679,103.124 98.425,103.378 96.647,101.6 96.647,100.203 96.52,100.203 96.139,100.076 93.218,97.155
3V7 on Bottom Layer "Component Side-No Net 1" (solid, remove dead copper, pour order 46): 93.632,96.36 93.632,96.233 96.012,93.853 96.52,93.345 96.52,92.837 96.52,92.71 96.139,92.329 96.012,92.456 94.869,92.456 94.488,92.456 92.202,94.742
3V7 on Bottom Layer "Component Side-No Net 1" (solid, remove dead copper, pour order 44): 91.821,94.996 92.456,95.631 92.837,95.631 93.599,96.393 94.996,94.996 94.996,94.869 94.361,94.234 95.377,93.218 96.012,93.853 97.282,92.583 97.282,92.329 97.282,91.694 96.52,90.932 96.266,90.932 96.139,90.932 95.758,91.313 95.631,91.44 95.25,91.44 95.123,91.44 93.853,92.71 91.821,94.742 91.821,94.996
GND on Bottom Layer "Component Side-No Net 1" (solid, remove dead copper, pour order 63): 92.085,101.678 92.202,101.795 92.202,104.013 94.107,104.013 94.234,103.886 94.234,101.6
12V on Bottom Layer "Component Side-No Net 1" (solid, remove dead copper, pour order 68): 100.852,95.645 100.852,95.363 101.346,94.869 101.981,94.234 101.981,93.853 101.981,93.726 101.346,93.091 101.219,92.964 101.219,92.71 101.981,91.948 102.108,91.821 102.235,91.821 105.029,94.615 105.664,95.25 105.664,95.758 105.664,95.885 105.537,96.012 105.537,96.774 105.664,96.901 106.934,96.901 106.934,97.917 106.299,98.552 101.473,98.552
GND on Bottom Layer "Component Side-No Net 1" (solid, remove dead copper, pour order 69): 98.425,95.885 98.425,93.345 99.06,92.71 99.822,91.948 99.822,90.551 99.822,88.392 100.457,87.757 101.092,87.122 112.903,87.122 112.903,94.361 112.776,94.488 112.268,94.996 112.268,95.631 109.347,95.631 108.712,94.996 108.585,94.869 107.569,94.869 107.569,94.996 107.061,95.504 107.061,95.885
VMCU on Bottom Layer "Component Side-No Net 1" (solid, remove dead copper, pour order 70): 92.111,102.657 92.325,102.87 94.488,102.87 94.588,102.87 94.919,102.539 95.123,102.335 95.123,100.838 92.202,100.838 92.075,100.711
GND on Bottom Layer "Component Side-No Net 1" (solid, remove dead copper, pour order 76): 98.526,107.62 100.663,107.62 100.782,107.501 100.782,106.59 99.859,106.59 99.314,106.045 98.601,106.045 98.044,106.045 97.917,106.172 97.842,106.247 97.842,107.297
GND on Bottom Layer "Component Side-No Net 1" (solid, remove dead copper, pour order 78): 98.298,109.855 98.298,108.133 98.271,108.106 98.383,107.994 100.203,107.994 100.203,111.252 100.584,111.633
GND on Bottom Layer "Component Side-No Net 1" (solid, remove dead copper, pour order 43): 85.471,114.173 86.868,112.776 112.268,112.776 112.268,93.218 108.458,89.408 106.934,87.884 83.82,87.884
VBAT on Bottom Layer "Component Side-No Net 1" (solid, remove dead copper, pour order 45): 85.471,107.188 101.346,107.188 105.664,102.87 104.775,101.981 104.775,94.996 102.743,94.996 99.314,91.567 92.202,91.567
GND on Bottom Layer "Component Side-No Net 1" (solid, remove dead copper, pour order 4): 89.027,96.52 89.154,96.647 91.948,96.647 92.075,96.647 92.456,96.266 92.456,93.98 91.059,93.98 89.916,92.837
GND on Bottom Layer "Component Side-No Net 1" (solid, remove dead copper, pour order 2): 91.313,108.585 93.853,106.045 93.853,105.791 93.853,105.664 92.837,104.648 92.837,103.124 92.837,102.971 92.523,102.657 92.31,102.87 90.551,102.87 90.551,108.331 90.678,108.458
12V on Top Layer "Component Side-No Net 1" (solid, remove dead copper, pour order 64): 102.489,105.664 103.632,105.664 103.632,106.934 103.759,106.807 105.283,106.807 105.283,102.235 104.902,101.854 104.902,101.473 102.616,101.473 102.489,101.6
NetC23_2 on Top Layer "Component Side-No Net 1" (solid, remove dead copper, pour order 61): 98.933,95.123 98.933,98.806 100.711,98.806 101.092,98.425 101.346,98.171 101.346,96.901 100.144,96.901 100.017,96.774 100.141,96.65 100.141,95.123
GND on Top Layer "Component Side-No Net 1" (solid, remove dead copper, pour order 59): 99.949,96.774 101.073,96.774 101.092,96.755 100.838,96.501 100.838,94.742 100.076,94.742 99.949,94.869
12V on Top Layer "Component Side-No Net 1" (solid, remove dead copper, pour order 58): 103.759,104.775 107.188,104.775 107.188,100.838 106.934,100.584 105.552,100.584 105.552,97.17 105.41,97.028 104.775,96.393 103.886,96.393
GND on Top Layer "Component Side-No Net 1" (solid, remove dead copper, pour order 57): 105.548,98.564 105.548,100.573 105.537,100.584 106.68,100.584 106.934,100.584 107.188,100.838 107.188,102.616 107.188,104.775 111.125,104.775 111.125,103.251 112.141,102.235 111.76,101.854 111.76,92.964 106.68,92.964 106.426,92.71
GND on Top Layer "Component Side-No Net 1" (solid, remove dead copper, pour order 55): 105.537,99.441 106.045,99.441 106.045,97.663 105.537,97.663
SGND on Top Layer "Component Side-No Net 1" (solid, remove dead copper, pour order 54): 107.696,97.536 108.458,97.536 108.712,97.79 109.22,97.79 109.347,97.79 109.474,97.917 109.474,99.06 108.712,99.06 108.585,98.933 108.585,98.552 108.331,98.298 108.204,98.171 107.696,98.171
12V on Top Layer "Component Side-No Net 1" (solid, remove dead copper, pour order 53): 107.188,97.028 107.188,97.536 105.41,97.536 105.41,98.044 105.41,98.425 104.267,98.425 104.267,97.028 104.521,96.774 107.188,96.774
SW on Top Layer "Component Side-No Net 1" (solid, remove dead copper, pour order 51): 99.441,98.933 100.965,98.933 101.092,98.806 101.092,97.155 101.092,95.504 100.838,95.25 100.711,95.123 99.949,95.123 98.425,95.123 97.79,94.488 97.79,92.583 97.79,91.694 102.743,91.694 103.251,91.694 104.521,92.964 104.648,93.091 105.664,93.091 105.664,93.98 104.775,93.98 105.537,94.742 105.802,95.007 105.802,95.751 105.802,96.023 105.918,96.139 107.188,96.139 107.188,96.774 105.029,96.774 104.521,96.774 104.394,96.901 104.267,97.028 104.267,101.346 99.568,101.346 99.441,101.219
BST on Top Layer "Component Side-No Net 1" (solid, remove dead copper, pour order 50): 105.918,96.012 105.918,95.377 105.918,94.361 105.664,94.107 104.902,94.107 104.902,94.742 105.537,94.742 105.664,94.869 105.664,96.012
3V7 on Top Layer "Component Side-No Net 1" (solid, remove dead copper, pour order 49): 93.091,99.441 93.091,99.695 94.996,99.695 94.996,101.219 97.536,101.219 97.536,91.948 96.647,91.059 96.393,91.059 95.885,91.059 95.25,91.694 92.837,94.107 92.837,94.996 92.837,95.885 93.091,96.139
GND on Top Layer "Component Side-No Net 1" (solid, remove dead copper, pour order 52): 96.647,92.71 97.917,93.98 105.283,93.98 105.664,93.98 105.791,93.853 107.442,93.853 109.728,93.853 109.474,93.599 109.474,89.154 105.537,89.154 102.87,86.487 100.965,88.392 91.567,88.392 91.567,91.059 90.17,92.456 88.011,94.615 88.011,95.25 88.011,99.822 88.138,99.695 93.091,99.695 94.742,99.695 95.123,99.314
GND on Top Layer "Component Side-No Net 1" (solid, remove dead copper, pour order 60): 90.424,106.426 92.202,108.204 96.647,108.204 106.299,108.204 107.442,109.347 107.442,112.903 90.551,112.903 90.043,112.395
3V7 on Top Layer "Component Side-No Net 1" (solid, remove dead copper, pour order 66): 92.45,92.45 97.847,91.186 97.847,101.543 97.806,101.584 97.806,104.483 96.355,104.483 95.123,103.251 94.107,102.235 94.107,98.171
GND on Top Layer "Component Side-No Net 1" (solid, remove dead copper, pour order 67): 86.741,101.473 89.916,101.473 90.932,100.457 92.075,99.314 92.329,99.314 92.329,97.282 91.948,96.901 91.186,96.139 85.217,96.139
VMCU on Top Layer "Component Side-No Net 1" (solid, remove dead copper, pour order 71): 92.075,102.997 93.345,102.997 94.158,102.997 94.323,102.832 94.488,102.667 94.488,100.33 94.488,100.076 94.742,99.822 92.074,99.822
GND on Top Layer "Component Side-No Net 1" (solid, remove dead copper, pour order 73): 88.265,104.394 92.588,104.394 92.891,104.091 92.71,103.91 92.71,99.441 86.487,99.441 86.36,99.568
GND on Top Layer "Component Side-No Net 1" (solid, remove dead copper, pour order 77): 97.917,110.871 97.917,107.696 98.127,107.906 99.878,107.906 100.33,107.906 100.457,107.779 100.838,108.16 100.838,111.125
GND on Top Layer "Component Side-No Net 1" (solid, remove dead copper, pour order 80): 105.029,111.379 104.648,110.998 104.648,104.013 104.648,103.251 106.426,101.473 114.173,101.473 114.173,107.823 113.665,108.331
VFAN on Top Layer "Component Side-No Net 1" (solid, remove dead copper, pour order 41): 97.79,104.775 99.187,104.775 99.187,106.553 103.886,106.553 103.886,101.473 104.267,101.092 96.647,101.092 96.647,104.628 96.648,104.629
GND on Top Layer "Component Side-No Net 1" (solid, remove dead copper, pour order 42): 87.757,113.792 88.9,112.649 111.379,112.649 111.379,93.345 107.315,89.281 106.68,88.646 92.583,88.646 92.583,88.773 88.011,93.345
12V on Signal Layer 1 "Component Side-No Net 1" (solid, remove dead copper, pour order 62): 106.934,98.171 106.934,96.774 106.807,96.901 104.648,96.901 103.378,96.901 103.378,103.124 106.934,103.124 106.934,102.108 105.664,100.838 105.664,100.457 105.664,99.568 105.537,99.441 105.664,99.314 105.664,98.298 106.807,98.298
3V7 on Signal Layer 1 "Component Side-No Net 1" (solid, remove dead copper, pour order 74): 92.964,96.139 93.218,96.393 94.361,96.393 97.663,93.091 97.663,92.075 96.901,91.313 95.758,91.313 95.631,91.313 92.837,94.107 92.837,96.012
12V on Signal Layer 1 "Component Side-No Net 1" (solid, remove dead copper, pour order 79): 102.489,96.012 102.489,104.648 102.997,105.156 103.505,104.648 108.204,104.648 108.204,94.361
GND on Signal Layer 1 "Component Side-No Net 1" (solid, remove dead copper, pour order 48): 81.28,117.729 109.728,117.729 115.697,111.76 113.919,109.982 113.919,90.551 109.728,84.328 94.742,84.963 94.361,84.582 81.788,84.582
12V on Internal Plane 1 (split plane): 107.186,103.07 107.186,101.019 106.626,100.459 106.045,100.459 105.995,100.45 105.953,100.422 105.191,99.66 105.163,99.618 105.154,99.568 105.154,98.425 105.163,98.375 105.191,98.333 105.699,97.825 105.741,97.797 105.791,97.788 107.134,97.788 107.44,97.482 107.44,96.447 107.007,96.014 104.067,96.014 103.507,96.574 103.507,102.308 104.575,103.376 106.88,103.376
3V7 on Internal Plane 1 (split plane): 97.534,92.656 97.534,91.748 97.101,91.315 95.939,91.315 95.342,91.913 95.3,91.941 95.25,91.95 94.796,91.95 92.712,94.034 92.712,95.123 92.712,95.831 93.145,96.264 93.926,96.264
GND on Internal Plane 1 (split plane): 153 vertices, not listed, extent 89.508,89.508 110.492,110.492

## Keep-outs
Keep-Out Layer:
  circle w0.254: c100,100 r11

## Other copper
Top Layer:
  rectangle net GND: 90.17,98.425 92.894,100.221
Signal Layer 1:
  rectangle net VMCU: 92.71,101.346 93.98,102.616
  text "哎哟~" at 101.346,97.663 h1.27 r90
  text "你干嘛~" at 102.87,97.028 h1.27 r90
Bottom Layer:
  rectangle net 12V: 104.902,102.108 106.934,103.124
  rectangle net GND: 99.06,90.17 100.203,92.329
  rectangle net GND: 90.297,101.346 91.694,102.235
  rectangle net GND: 91.44,101.346 92.329,102.235
Internal Plane 1 (plane layer: these items are gaps in the copper):
  lines w0.254: 92.583,93.98 94.742,91.821 95.25,91.821 95.885,91.186 97.155,91.186 97.663,91.694 97.663,92.71 93.98,96.393 93.091,96.393 92.583,95.885 92.583,95.123 92.583,93.98 ; 103.378,96.52 103.378,102.362 104.521,103.505 106.934,103.505 107.315,103.124 107.315,100.965 106.68,100.33 106.045,100.33 105.283,99.568 105.283,98.425 105.791,97.917 107.188,97.917 107.569,97.536 107.569,96.393 107.061,95.885 104.013,95.885 103.378,96.52

## Silkscreen, mask and mechanical layers (free items; w line width, h text height)
Top Overlay:
  circle w0.254: c100,100 r10
  rectangle: 102.108,101.6 104.267,102.362
  rectangle: 108.585,97.282 109.093,97.79
  rectangle: 106.934,96.139 107.696,97.663
  lines w0.254: 94.718,91.505 97.979,91.505 ; 97.79,106.807 98.044,107.061 ; 101.662,91.505 104.718,91.505
  text "PG" at 97.155,105.156 h1.4 r270
  text "6" at 107.442,104.902 h1.4
  text "V" at 97.028,103.124 h1.52
  text "坤" at 95.758,101.473 h1.27
  text "坤" at 99.441,101.346 h1.27
  text "烫" at 104.902,99.06 h1.78
  text "JLCJLCJLCJLC" at 98.679,94.615 h1.5 r90
  text "35" at 94.488,92.456 h1.78 r90
  text "抄板" at 95.123,91.948 h1.27
  text "死妈" at 101.854,91.948 h1.27
Bottom Overlay:
  circle w0.254: c100,100 r10
  rectangle: 97.198,105.537 97.663,106.218
  text "V1.1" at 102.235,108.839 h1.4
  text "T" at 96.393,108.585 h1.27 r270
  text "DB" at 95.504,108.204 h1.4 r90
  text "坤" at 108.331,105.283 h1.27 r90
  text "B+" at 102.997,103.886 h1.4 r135
  text "P" at 96.774,103.632 h1.78 r90
  text "XRFan Ultra" at 105.029,103.378 h1.27 r90
  text "4L" at 107.061,102.997 h1.4
  text "2Oz" at 107.442,101.981 h1.4
  text "2609" at 93.726,99.949 h1.4
  text "For" at 106.426,99.568 h1.4 r90
  text "FLBM3" at 109.347,97.282 h1.4
  text "1S" at 100.965,94.996 h1.52
  text "猛" at 107.315,94.742 h1.27
  text "Red35" at 94.996,92.075 h1.27 r315
  text "By:" at 96.647,90.805 h1.52 r315
  text "12V4A" at 101.854,90.17 h1.78 r315
Top Solder:
  circle w1: c100,100 r10.65
  rectangle: 103.886,96.52 105.029,96.774
  rectangle: 98.596,90.892 100.398,91.406
Bottom Solder:
  circle w1: c100,100 r10.65